# Altium PCB PCB1.PcbDoc
Units mil, origin at the board's own origin, x right, y up, seen from the top; angles counter-clockwise.
Board outline 3080.9 x 2293.49 mil, 2 copper layers (Top Layer, Bottom Layer); 59 components, 87 nets, 266 pads, 62 vias.
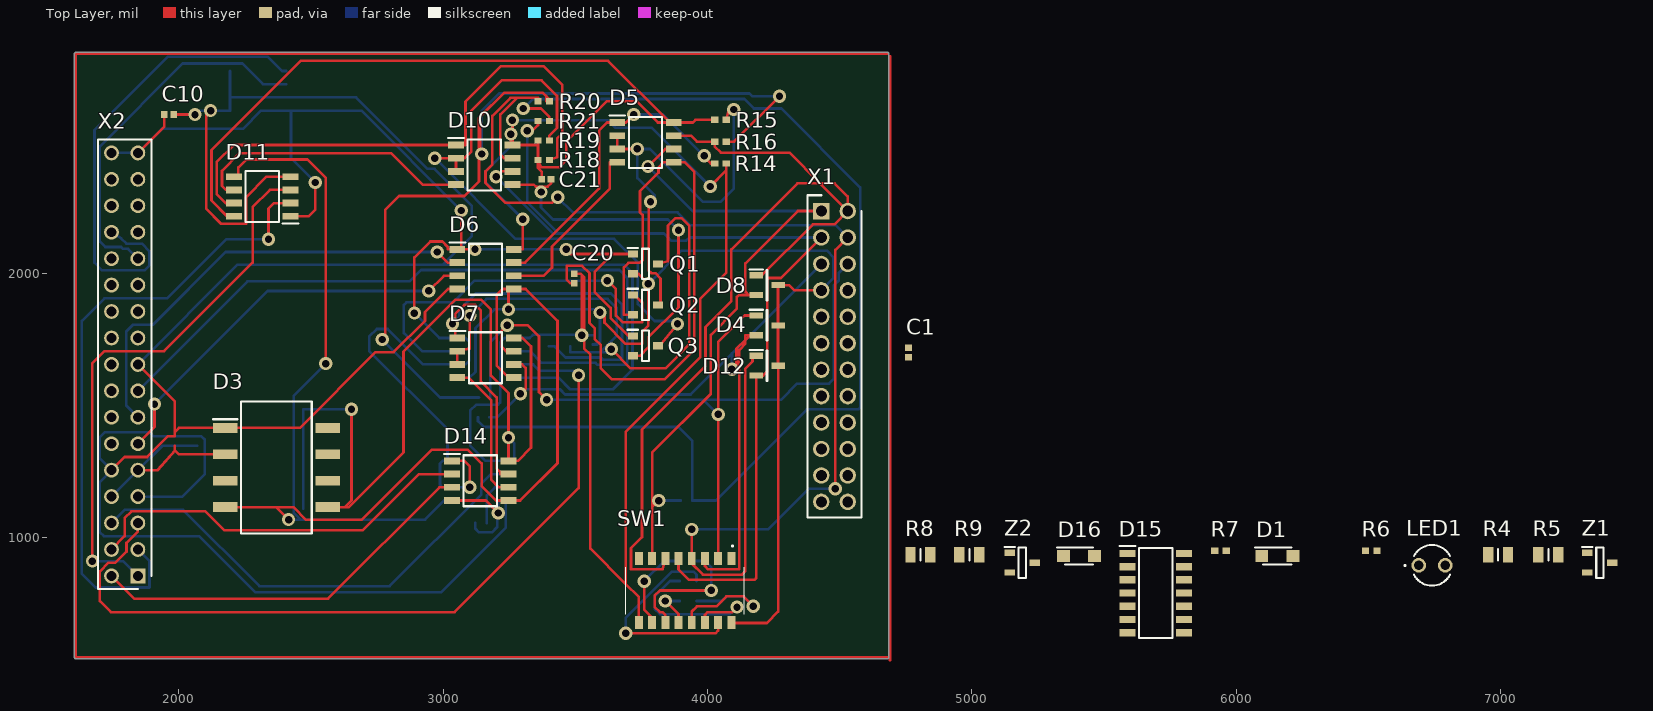
[diagram p0: Top Layer view]
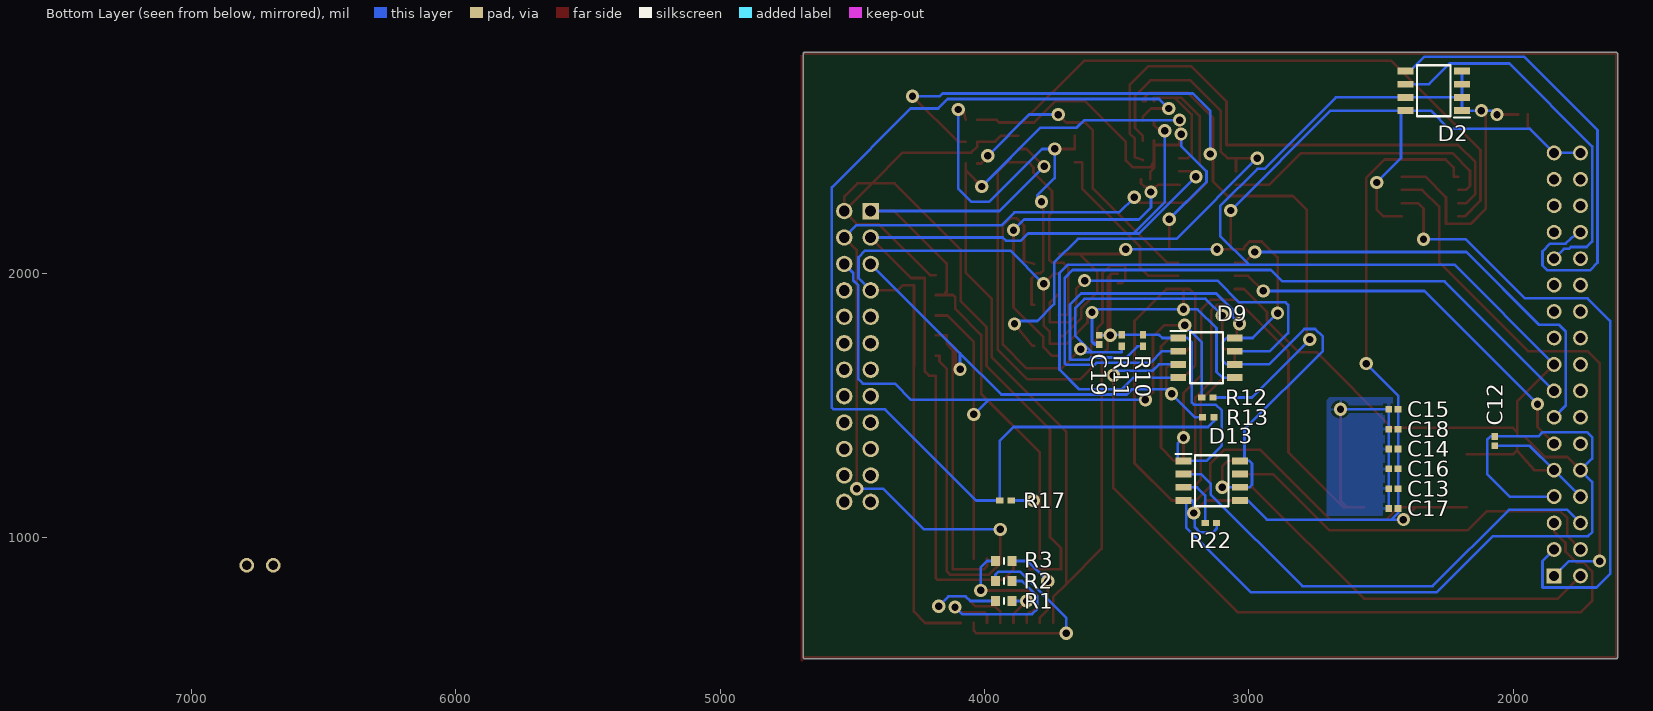
[diagram p1: Bottom Layer view, seen from below]

## Layer stack, top to bottom
Top Solder: solder mask 0.4, Solder Resist, Dk 3.5
Top Layer: signal copper 1.4
Dielectric 1: dielectric 12.6, FR-4, Dk 4.8
Bottom Layer: signal copper 1.4
Bottom Solder: solder mask 0.4, Solder Resist, Dk 3.5

## Board outline
1604.99,546.54 1604.98,2830 cw(c1610,2830) 1610,2835.01 4680.87,2835.01 cw(c4680.87,2830) 4685.88,2830 cw(c4680.87,2830) 4685.01,2827.18 4685.02,546.54 cw(c4680,546.54) 4680,541.52 1610,541.52 cw(c1610,546.54)

## Design rules (kind name [scope] priority, off if disabled: settings)
Clearance [All] p1: gap=10 ignorepadtopadclearanceinfootprint=FALSE except(0: Arc-Hole Track-Hole SMDPad-Hole THPad-Hole Via-Hole Fill-Hole Poly-Hole Region-Hole Text-Hole)
PolygonConnect [All] p1: connectstyle=Relief reliefconductorwidth=10 reliefentries=4 polygonreliefangle="90 Angle" airgapwidth=10
RoomDefinition Sheet1 [InComponentClass('Sheet1')] p1: confinementstyle=ConfineIn formatcopy=TRUE lockcomponents=FALSE outline 4730,600 7460,600 7460,1085 4730,1085
RoomDefinition Sheet2 [InComponentClass('Sheet2')] p2: confinementstyle=ConfineIn formatcopy=TRUE lockcomponents=FALSE outline 1620,541.54 4690,541.54 4690,2825 1620,2825
RoutingVias [All] p1: holewidth=28 width=50 viastyle="Through Hole" minholewidth=28 minwidth=50 maxholewidth=28 maxwidth=50
SolderMaskExpansion [All] p1: expansion=4
Width [All] p1: maxlimit=10 minlimit=10 preferedwidth=10
30 further rules are at their usual default settings.

## Classes and differential pairs
component class Sheet1: D1 D15 D16 LED1 R4 R5 R6 R7 R8 R9 Z1 Z2
component class Sheet2: C10 C12 C13 C14 C15 C16 C17 C18 C19 C20 C21 D2 D3 D4 D5 D6 D7 D8 D9 D10 D11 D12 D13 D14 Q1 Q2 Q3 R1 R2 R3 R10 R11 R12 R13 R14 R15 R16 R17 R18 R19 R20 R21 R22 SW1 X1 X2

## Components (designator, comment, footprint, x,y, rotation, side; value= is the part's Value field where it differs from the comment)
C1 "04023C104JAT2A" CAPC1005X56N 4760,1700 r90 top
C10 "04024D106MAT2A" CAPC1005X56N 1962.72,2600 r180 top
C12 "04024D106MAT2A" CAPC1005X56N 2070,1365 r270 bottom
C13 "04023C104JAT2A" CAPC1005X56N 2452.72,1185.04 r0 bottom
C14 "04023C104JAT2A" CAPC1005X56N 2452.72,1334.96 r0 bottom
C15 "04023C104JAT2A" CAPC1005X56N 2452.72,1484.96 r0 bottom
C16 "04023C104JAT2A" CAPC1005X56N 2452.72,1260 r0 bottom
C17 "04024D106MAT2A" CAPC1005X56N 2452.72,1109.96 r0 bottom
C18 "04024D106MAT2A" CAPC1005X56N 2452.72,1410 r0 bottom
C19 "04023C104JAT2A" CAPC1005X56N 3565,1747.72 r90 bottom
C20 "04023C104JAT2A" CAPC1005X56N 3495,1980 r90 top
C21 "04023C104JAT2A" CAPC1005X56N 3390,2355 r180 top
D1 "SMF18AT1G" SODFL3616X98N 6155,930 r0 top
D2 "M24C16-WMN6TP" SOIC127P600X175-8N 2300,2690 r0 bottom
D3 "AM1L-0505S-NZ" SOP254P1120X650-8N 2368.9,1265 r0 top
D4 "SM712.TCT" SOT95P237X112-3N 4225,1802.5 r0 top
D5 "ADM483EARZ" SOIC127P600X175-8N 3765,2495 r0 top
D6 "ADUM1201ARZ-RL7" SOIC127P600X175-8N 3160,2015 r0 top
D7 "ADM483EARZ" SOIC127P600X175-8N 3160,1680 r0 top
D8 "SM712.TCT" SOT95P237X112-3N 4225,1955 r0 top
D9 "ADUM1200ARZ-RL7" SOIC127P600X175-8N 3160,1680 r180 bottom
D10 "ADM483EARZ" SOIC127P600X175-8N 3155,2410 r0 top
D11 "ADUM1201ARZ-RL7" SOIC127P600X175-8N 2315,2290 r180 top
D12 "SM712.TCT" SOT95P237X112-3N 4225,1650 r0 top
D13 "ADUM1200ARZ-RL7" SOIC127P600X175-8N 3140,1215 r180 bottom
D14 "ADUM1201ARZ-RL7" SOIC127P600X175-8N 3140,1215 r0 top
D15 "74HCT14D,652" SOIC127P600X175-14N 5695,790 r0 top
D16 "SMF18AT1G" SODFL3616X98N 5405,930 r0 top
LED1 "151034GS03000" 151034GS03000 6740,895 r0 top
Q1 "2N7002" SOT95P240X120-3N 3765,2035 r0 top
Q2 "2N7002" SOT95P240X120-3N 3765,1880 r0 top
Q3 "2N7002" SOT95P240X120-3N 3765,1725 r0 top
R1 "BLM18AG121SN1D" BEADC1608X95N 3926.5,760 r180 bottom
R2 "BLM18AG121SN1D" BEADC1608X95N 3926.5,835.72 r180 bottom
R3 "BLM18AG121SN1D" BEADC1608X95N 3926.5,911.44 r180 bottom
R4 "CPF0805B330RE" RESC2012X65N 6990,935 r0 top
R5 "CPF0805B330RE" RESC2012X65N 7180,935 r0 top
R6 "CPF0402B300RE" RESC1005X35N 6510,950 r0 top
R7 "CPF0402B10K2E1" RESC1005X35N 5940,950 r0 top
R8 "CPF0805B330RE" RESC2012X65N 4805,935 r0 top
R9 "CPF0805B330RE" RESC2012X65N 4990,935 r0 top
R10 "CPF0402B14K7E1" RESC1005X35N 3400,1745 r90 bottom
R11 "CPF0402B14K7E1" RESC1005X35N 3480,1745 r90 bottom
R12 "CPF0402B475RE1" RESC1005X35N 3156.65,1530 r180 bottom
R13 "CPF0402B475RE1" RESC1005X35N 3153.35,1455 r0 bottom
R14 "CPF0402B14K7E1" RESC1005X35N 4048.35,2415 r0 top
R15 "CPF0402B14K7E1" RESC1005X35N 4048.35,2580 r180 top
R16 "CPF0402B475RE1" RESC1005X35N 4048.35,2497.5 r0 top
R17 "CPF0402B475RE1" RESC1005X35N 3920,1140 r180 bottom
R18 "CPF0402B14K7E1" RESC1005X35N 3380,2428.16 r180 top
R19 "CPF0402B14K7E1" RESC1005X35N 3380,2502.11 r180 top
R20 "CPF0402B475RE1" RESC1005X35N 3380,2650 r0 top
R21 "CPF0402B475RE1" RESC1005X35N 3380,2576.05 r180 top
R22 "CPF0402B14K7E1" RESC1005X35N 3143.35,1055 r0 bottom
SW1 "NHDS08T" NHDS08T 3915,798.94 r180 top
X1 "1-826656-2" HDRV24W85P254_2X12_3048X500X900P 4430,2235 r270 top
X2 "6-534206-7" SHDR34W76P254_2X17_4318X503X813P 1845,855 r90 top
Z1 "SZBZX84C10LT1G" SOT96P237X111-3N 7375,905 r0 top
Z2 "SZBZX84C10LT1G" SOT96P237X111-3N 5190,905 r0 top

## Footprints (in the part's own frame and the unit in brackets; to place one, negate y for a bottom-side part, rotate by r counter-clockwise, add the part's x,y. Pads: shape width x height; smd on the part's side, far side on the other; paste and mask are expansions set on the pad)
151034GS03000 [mm]
  round 1.41 hole 0.91: 1(-1.27,0) 2(1.27,0)
  silkscreen extent -2.63,-1.95 1.73,1.95
BEADC1608X95N [mm]
  rect 0.85x1 smd: 1(-0.8,0) 2(0.8,0)
  silkscreen extent 0,-0.3 0,0.3, body extent -0.8,-0.4 0.8,0.4, height 0.95
CAPC1005X56N [mm]
  rect 0.65x0.64 smd: 1(-0.45,0) 2(0.45,0)
  body extent -0.5,-0.25 0.5,0.25, height 0.56
HDRV24W85P254_2X12_3048X500X900P [mm]
  rect 1.575x1.575 hole 1.05: 1(0,0)
  round 1.575 hole 1.05: 2(0,2.54) 3(2.54,0) 4(2.54,2.54) 5(5.08,0) 6(5.08,2.54) 7(7.62,0) 8(7.62,2.54) 9(10.16,0) 10(10.16,2.54) 11(12.7,0) 12(12.7,2.54) 13(15.24,0) 14(15.24,2.54) 15(17.78,0) 16(17.78,2.54) 17(20.32,0) 18(20.32,2.54) 19(22.86,0) 20(22.86,2.54) 21(25.4,0) 22(25.4,2.54) 23(27.94,0) 24(27.94,2.54)
  silkscreen extent -1.52,-1.33 29.46,3.87, body extent -1.27,-1.23 29.21,3.77, height 9
NHDS08T [mm]
  rect 0.76x1.25 smd: 1(-4.445,-3.075) 2(-3.175,-3.075) 3(-1.905,-3.075) 4(-0.635,-3.075) 5(0.635,-3.075) 6(1.905,-3.075) 7(3.175,-3.075) 8(4.445,-3.075) 9(4.445,3.075) 10(3.175,3.075) 11(1.905,3.075) 12(0.635,3.075) 13(-0.635,3.075) 14(-1.905,3.075) 15(-3.175,3.075) 16(-4.445,3.075)
  silkscreen extent -5.69,-4.35 5.69,2.25
RESC1005X35N [mm]
  rect 0.7x0.6 smd: 1(-0.55,0) 2(0.55,0)
  body extent -0.5,-0.25 0.5,0.25, height 0.35
RESC2012X65N [mm]
  rect 1x1.45 smd: 1(-0.95,0) 2(0.95,0)
  silkscreen extent 0,-0.53 0,0.53, body extent -1,-0.63 1,0.63, height 0.65
SHDR34W76P254_2X17_4318X503X813P [mm]
  rect 1.425x1.425 hole 0.95: 1(0,0)
  round 1.425 hole 0.95: 2(0,2.54) 3(2.54,0) 4(2.54,2.54) 5(5.08,0) 6(5.08,2.54) 7(7.62,0) 8(7.62,2.54) 9(10.16,0) 10(10.16,2.54) 11(12.7,0) 12(12.7,2.54) 13(15.24,0) 14(15.24,2.54) 15(17.78,0) 16(17.78,2.54) 17(20.32,0) 18(20.32,2.54) 19(22.86,0) 20(22.86,2.54) 21(25.4,0) 22(25.4,2.54) 23(27.94,0) 24(27.94,2.54) 25(30.48,0) 26(30.48,2.54) 27(33.02,0) 28(33.02,2.54) 29(35.56,0) 30(35.56,2.54) 31(38.1,0) 32(38.1,2.54) 33(40.64,0) 34(40.64,2.54)
  silkscreen extent -1.27,-1.31 41.91,3.85
SODFL3616X98N [mm]
  rect 1.24x1.12 smd: 1(-1.5,0) 2(1.5,0)
  silkscreen extent -2.12,-0.82 1.35,0.82, body extent -1.8,-0.82 1.8,0.82, height 0.98
SOIC127P600X175-8N [mm]
  rect 1.525x0.65 smd: 1(-2.712,1.905) 2(-2.712,0.635) 3(-2.712,-0.635) 4(-2.712,-1.905) 5(2.712,-1.905) 6(2.712,-0.635) 7(2.712,0.635) 8(2.712,1.905)
  silkscreen extent -3.47,-2.45 1.6,2.58, body extent -3,-2.45 3,2.45, height 1.75
SOIC127P600X175-14N [mm]
  rect 1.55x0.7 smd: 1(-2.725,3.81) 2(-2.725,2.54) 3(-2.725,1.27) 4(-2.725,0) 5(-2.725,-1.27) 6(-2.725,-2.54) 7(-2.725,-3.81) 8(2.725,-3.81) 9(2.725,-2.54) 10(2.725,-1.27) 11(2.725,0) 12(2.725,1.27) 13(2.725,2.54) 14(2.725,3.81)
  silkscreen extent -3.5,-4.33 1.6,4.51, body extent -3,-4.33 3,4.33, height 1.75
SOP254P1120X650-8N [mm]
  rect 2.35x0.95 smd: 1(-4.925,3.81) 2(-4.925,1.27) 3(-4.925,-1.27) 4(-4.925,-3.81) 5(4.925,-3.81) 6(4.925,-1.27) 7(4.925,1.27) 8(4.925,3.81)
  silkscreen extent -6.1,-6.35 3.4,6.35, body extent -5.6,-6.35 5.6,6.35, height 6.5
SOT95P237X112-3N [mm]
  rect 1.3x0.6 smd: 1(-1.05,0.95) 2(-1.05,-0.95) 3(1.05,0)
  silkscreen extent -1.7,-1.46 0.05,1.5, body extent -1.18,-1.46 1.18,1.46, height 1.12
SOT95P240X120-3N [mm]
  rect 1x0.7 smd: 1(-1.2,0.95) 2(-1.2,-0.95) 3(1.2,0)
  silkscreen extent -1.7,-1.46 0.35,1.55, body extent -1.2,-1.46 1.2,1.46, height 1.2
SOT96P237X111-3N [mm]
  rect 1x0.6 smd: 1(-1.2,0.955) 2(-1.2,-0.955) 3(1.2,0)
  silkscreen extent -1.7,-1.46 0.35,1.51, body extent -1.18,-1.46 1.18,1.46, height 1.11

## Part data
C1 C13 C14 C15 C16 C19 C20 C21: "Capacitor", Manufacturer_Name=AVX, Mouser Part Number=581-04023C104JAT2A, RS Part Number=1356696, Datasheet Link=http://www.mouser.com/catalog/supplier/library/pdf/AVXSurfaceMountCeramic.pdf, Height=0.56mm, Manufacturer_Part_Number=04023C104JAT2A, Mouser Price/Stock=http://www.mouser.com/Search/ProductDetail.aspx?qs=ZBeOGGPQgEHeKFST9wrKRw%3d%3d, RS Price/Stock=https://uk.rs-online.com/web/p/products/1356696
C10 C12 C17 C18: "Capacitor", Manufacturer_Name=AVX, Mouser Part Number=581-04024D106MAT2A, Datasheet Link=http://www.mouser.com/catalog/supplier/library/pdf/AVXSurfaceMountCeramic.pdf, Height=0.56mm, Manufacturer_Part_Number=04024D106MAT2A, Mouser Price/Stock=https://www.mouser.com/Search/Refine.aspx?Keyword=581-04024D106MAT2A
D1 D16: "Diode", Manufacturer_Name="ON Semiconductor", Allied_Number=70600054, Allied Price/Stock=http://www.alliedelec.com/on-semiconductor-smf18at1g/70600054/, Datasheet Link=http://www.onsemi.com/pub/Collateral/SMF5.0AT1-D.PDF, Height=0.98mm, Manufacturer_Part_Number=SMF18AT1G
D2: "Integrated Circuit", Manufacturer_Name=STMicroelectronics, Mouser Part Number=511-M24C16-WMN6TP, RS Part Number=6862390, Allied_Number=70013715, Allied Price/Stock=http://www.alliedelec.com/stmicroelectronics-m24c16-wmn6tp/70013715/, Datasheet Link=http://www.st.com/st-web-ui/static/active/en/resource/technical/document/datasheet/DM00061111.pdf, Height=1.75mm, Manufacturer_Part_Number=M24C16-WMN6TP, Mouser Price/Stock=https://www.mouser.com/Search/Refine.aspx?Keyword=511-M24C16-WMN6TP, RS Price/Stock=https://uk.rs-online.com/web/p/products/6862390
D3: "Power Supply", Manufacturer_Name=aimtec, Datasheet Link=http://www.aimtec.com/site/Aimtec/files/Datasheet/HighResolution/AM1L-N-Z.pdf, Height=6.5mm, Manufacturer_Part_Number=AM1L-0505S-NZ
D4 D8 D12: "Diode", Manufacturer_Name=SEMTECH, Mouser Part Number=947-SM712.TCT, RS Part Number=6783470P, Datasheet Link=http://docs-emea.rs-online.com/webdocs/1385/0900766b81385d5f.pdf, Height=1.12mm, Manufacturer_Part_Number=SM712.TCT, Mouser Price/Stock=https://www.mouser.com/Search/Refine.aspx?Keyword=947-SM712.TCT, RS Price/Stock=http://uk.rs-online.com/web/p/products/6783470P
D5 D7 D10: "Integrated Circuit", Manufacturer_Name="Analog Devices", Mouser Part Number=584-ADM483EARZ, RS Part Number=2509605926, Manufacturer_Part_Number=ADM483EARZ, Mouser Price/Stock=https://www.mouser.com/Search/Refine.aspx?Keyword=584-ADM483EARZ, RS Price/Stock=http://uk.rs-online.com/web/p/products/2509605926
D6 D11 D14: "Integrated Circuit", Manufacturer_Name="Analog Devices", Mouser Part Number=584-ADUM1201ARZ-R7, RS Part Number=1832299, Datasheet Link=http://www.analog.com/media/en/technical-documentation/data-sheets/ADuM1200_1201.pdf, Height=1.75mm, Manufacturer_Part_Number=ADUM1201ARZ-RL7, Mouser Price/Stock=https://www.mouser.com/Search/Refine.aspx?Keyword=584-ADUM1201ARZ-R7, RS Price/Stock=http://uk.rs-online.com/web/p/products/1832299
D9 D13: "Integrated Circuit", Manufacturer_Name="Analog Devices", Mouser Part Number=584-ADUM1200ARZ-R7, RS Part Number=9140444, Datasheet Link=http://componentsearchengine.com/Datasheets/1/ADUM1200ARZ-RL7.pdf, Manufacturer_Part_Number=ADUM1200ARZ-RL7, Mouser Price/Stock=https://www.mouser.com/Search/Refine.aspx?Keyword=584-ADUM1200ARZ-R7, RS Price/Stock=http://uk.rs-online.com/web/p/products/9140444
D15: "Integrated Circuit", Manufacturer_Name=Nexperia, Mouser Part Number=771-HCT14D652, RS Part Number=1130641P, Datasheet Link=https://assets.nexperia.com/documents/data-sheet/74HC_HCT14.pdf, Height=1.75mm, Manufacturer_Part_Number=74HCT14D,652, Mouser Price/Stock=https://www.mouser.com/Search/Refine.aspx?Keyword=771-HCT14D652, RS Price/Stock=http://uk.rs-online.com/web/p/products/1130641P
LED1: "LED", Manufacturer_Name="Wurth Elektronik", RS Part Number=9010930, Datasheet Link=http://katalog.we-online.de/led/datasheet/151034GS03000.pdf, Manufacturer_Part_Number=151034GS03000, RS Price/Stock=https://uk.rs-online.com/web/p/products/9010930
Q1 Q2 Q3: "MOSFET (N-Channel)", Manufacturer_Name="Fairchild Semiconductor", Mouser Part Number=512-2N7002, Datasheet Link=http://www.onsemi.com/pub/Collateral/NDS7002A-D.PDF, Height=1.2mm, Manufacturer_Part_Number=2N7002, Mouser Price/Stock=https://www.mouser.com/Search/Refine.aspx?Keyword=512-2N7002
R1 R2 R3: "Ferrite Bead", Manufacturer_Name="Murata Electronics", Mouser Part Number=81-BLM11A121S, RS Part Number=6291628, Datasheet Link=http://www.murata.com/~/media/webrenewal/support/library/catalog/products/emc/emifil/c31e.ashx?la=en-gb, Height=0.95mm, Manufacturer_Part_Number=BLM18AG121SN1D, Mouser Price/Stock=https://www.mouser.com/Search/Refine.aspx?Keyword=81-BLM11A121S, RS Price/Stock=http://uk.rs-online.com/web/p/products/6291628
R4 R5 R8 R9: "Resistor", Manufacturer_Name="TE Connectivity", RS Part Number=6662471, Allied_Number=70286839, Allied Price/Stock=https://www.alliedelec.com/te-connectivity-cpf0805b330re/70286839/, Datasheet Link=http://docs-europe.electrocomponents.com/webdocs/13d1/0900766b813d116f.pdf, Height=0.65mm, Manufacturer_Part_Number=CPF0805B330RE, RS Price/Stock=https://uk.rs-online.com/web/p/products/6662471
R6: "Resistor", Manufacturer_Name="TE Connectivity", RS Part Number=6661327, Datasheet Link=http://www.farnell.com/datasheets/1786775.pdf, Height=0.35mm, Manufacturer_Part_Number=CPF0402B300RE, RS Price/Stock=https://uk.rs-online.com/web/p/products/6661327
R7: "Resistor", Manufacturer_Name="TE Connectivity", Mouser Part Number=279-CPF0402B10K2E1, RS Part Number=7015028, Allied_Number=70286155, Allied Price/Stock=https://www.alliedelec.com/te-connectivity-cpf0402b10k2e1/70286155/, Datasheet Link=http://www.farnell.com/datasheets/1786775.pdf, Height=0.35mm, Manufacturer_Part_Number=CPF0402B10K2E1, Mouser Price/Stock=https://www.mouser.com/Search/Refine.aspx?Keyword=279-CPF0402B10K2E1, RS Price/Stock=https://uk.rs-online.com/web/p/products/7015028
R10 R11 R14 R15 R18 R19 R22: "Resistor", Manufacturer_Name="TE Connectivity", Mouser Part Number=279-CPF0402B14K7E1, RS Part Number=7015122, Allied_Number=70286210, Allied Price/Stock=https://www.alliedelec.com/te-connectivity-cpf0402b14k7e1/70286210/, Datasheet Link=http://www.farnell.com/datasheets/1786775.pdf, Height=0.35mm, Manufacturer_Part_Number=CPF0402B14K7E1, Mouser Price/Stock=https://www.mouser.com/Search/Refine.aspx?Keyword=279-CPF0402B14K7E1, RS Price/Stock=https://uk.rs-online.com/web/p/products/7015122
R12 R13 R16 R17 R20 R21: "Resistor", Manufacturer_Name="TE Connectivity", RS Part Number=7014807, Allied_Number=70286471, Allied Price/Stock=https://www.alliedelec.com/te-connectivity-cpf0402b475re1/70286471/, Datasheet Link=http://www.farnell.com/datasheets/1786775.pdf, Height=0.35mm, Manufacturer_Part_Number=CPF0402B475RE1, RS Price/Stock=https://uk.rs-online.com/web/p/products/7014807
SW1: "Switch", Manufacturer_Name=Apem, Mouser Part Number=642-NHDS08T, Datasheet Link=https://componentsearchengine.com/Datasheets/1/NHDS08T.pdf, Height=1.45mm, Manufacturer_Part_Number=NHDS08T, Mouser Price/Stock=https://www.mouser.com/Search/Refine.aspx?Keyword=642-NHDS08T
X1: "Connector", Manufacturer_Name="TE Connectivity", Mouser Part Number=571-1-826656-2, RS Part Number=6689624P, Allied_Number=70299217, Allied Price/Stock=https://www.alliedelec.com/te-connectivity-1-826656-2/70299217/, Datasheet Link=http://www.te.com/usa-en/product-1-826656-2.html, Height=9mm, Manufacturer_Part_Number=1-826656-2, Mouser Price/Stock=https://www.mouser.com/Search/Refine.aspx?Keyword=571-1-826656-2, RS Price/Stock=http://uk.rs-online.com/web/p/products/6689624P
X2: "Connector", Manufacturer_Name="TE Connectivity", Mouser Part Number=571-6-534206-7, RS Part Number=7936824, Datasheet Link=https://benl.rs-online.com/web/p/products/7936824P, Height=8.13mm, Manufacturer_Part_Number=6-534206-7, Mouser Price/Stock=https://www.mouser.com/Search/Refine.aspx?Keyword=571-6-534206-7, RS Price/Stock=https://uk.rs-online.com/web/p/products/7936824
Z1 Z2: "Zener Diode", Manufacturer_Name="ON Semiconductor", Mouser Part Number=863-SZBZX84C10LT1G, RS Part Number=8052914, Allied_Number=70467681, Allied Price/Stock=http://www.alliedelec.com/on-semiconductor-szbzx84c10lt1g/70467681/, Datasheet Link=http://www.onsemi.com/pub/Collateral/BZX84C2V4LT1-D.PDF, Height=1.11mm, Manufacturer_Part_Number=SZBZX84C10LT1G, Mouser Price/Stock=https://www.mouser.com/Search/Refine.aspx?Keyword=863-SZBZX84C10LT1G, RS Price/Stock=http://uk.rs-online.com/web/p/products/8052914

## Via types
v1: diameter 50, hole 28, Top Layer to Bottom Layer, 62 vias

## Nets (pads, with @x,y where several pads share a name; then routed paths per layer and width w, separated by ;. In a path a pad name is that pad's centre, name@x,y a point inside that pad or via, vN(x,y) a via of type N, cw(c..) or ccw(c..) an arc to the next point about the centre after c; other vN are vias at no path point)
+3.3V: C10.2 D2.8 D6.1 D9.6 D9.8 D11.1 D13.6 D13.8 D14.1 D15.14 Q1.1 Q3.1 R6.2 X2.33 X2.34 | length 5661.6
  Top Layer w10: X2.33 1945,2555 C10.2 ; D11.1 2491,2215 2516,2240 v1(2516,2343) ; v1(2891,1849) 2891,2059.76 2951.24,2120 2997,2120 3017,2100 3017,2090 D6.1 D6.1@3068,2090 ; D14.1 3080,1290 3100,1270 v1(3100,1190) ; v1(3068,2237) D6.1@3068,2090 ; v1(3120,2090) D6.1@3068,2090 ; v1(3465,2090) 3482.6,2072.4 3640,2072.4 ; Q3.1 3701,1762.4 3633,1830.4 3633,1868.6 3573,1928.6 3573,2005.4 3640,2072.4 ; Q1.1 3640,2072.4
  Bottom Layer w10: X2.34 X2.33 1936,2546 2242,2546 2311,2615 D2.8 D2.8@2424,2615 ; v1(2516,2343) 2424,2435 D2.8@2424,2615 ; v1(2891,1849) 2985,1755 D9.8 3084,1755 3099,1740 3099,1670 3084,1655 D9.6 2924,1655 2790,1789 2749,1789 2720,1760 2720,1706 3016,1410 D13.8@3016,1290 ; D13.8 D13.8@3016,1290 ; v1(3068,2237) 2690,2615 D2.8@2424,2615 ; v1(3100,1190) D13.6 2998,1190 2988,1200 2988,1280 2998,1290 D13.8@3016,1290 ; v1(3120,2090) v1(3465,2090)
+5: C1.2 C12.2 D3.2 X2.8 X2.9 | length 792.4
  Top Layer w10: X2.9 1920,1255 1985,1330 ; 1985,1347.28 1985,1330 ; D3.2 2000,1315 1985,1330
  Bottom Layer w10: X2.8 X2.9 1937.28,1347.28 C12.2
+5V_ISO: C13.2 C14.2 C15.2 C16.2 C17.2 C18.2 C19.2 C20.2 C21.2 D3.5 D5.8 D6.8 D7.8 D9.1 D10.8 D11.8 D13.1 D14.8 R10.2 R11.2 R14.2 R15.2 R18.2 R19.2 SW1.9 | length 12869.5
  Top Layer w10: D11.8 2183,2215 2123.21,2274.79 2123.21,2465.21 2461,2803 3624,2803 D5.8@3857,2570 ; D3.5 2628,1115 ; v1(2653,1484.96) 2653,1140 2628,1115 ; D14.8 D14.8@3247,1290 ; v1(3256,2526) 3256,2485 D10.8 ; v1(3261.77,2579) D10.8 ; D7.8 3300,1755 3331.79,1723.21 3331.79,1339.79 3282,1290 D14.8@3247,1290 ; D6.8 3301,2090 v1(3301,2204) ; R19.2 3358.35,2485 ; C21.2 3372.28,2384 3358.35,2397.94 R18.2 ; C20.2 3520,1997.72 3524,1993.72 ; v1(3524,1765.43) 3524,1993.72 ; SW1.9 3740,775.05 3690.04,825.01 ; v1(4010,2328) 4070,2388 ; R15.2 3954,2580 3944,2570 D5.8 D5.8@3857,2570 ; R14.2 4070,2388 ; 2628,1115 2643,1115 2849.87,1321.87 2849.87,1703.87 3046,1900 3142,1900 3180,1862 3180,1613.24 3247,1546.24 v1(3247,1378) D14.8@3247,1290 ; D10.8 3358.35,2485 ; R18.2 3358.35,2485 ; R18.2 3370,2401 3440,2401 3465,2426 3465,2497 3619,2651 3731,2651 3812,2570 D5.8@3857,2570 ; 3524,1993.72 3533,1984.72 3533,1716 3556.51,1692.49 3556.51,958.54 3690.04,825.01 ; 3690.04,825.01 3690.04,1400.04 3972,1682 3972,1903 4070,2001 4070,2388
  Bottom Layer w10: C17.2 C13.2 C16.2 C14.2 C18.2 C15.2 v1(2653,1484.96) ; v1(3247,1378) 3269,1356 3269,1290 D13.1 3160,1290 3102,1348 3102,1480 3125,1503 3208,1503 3215.29,1510.29 3215.29,1738.29 3232,1755 D9.1 3327,1755 3338.65,1766.65 R10.2 R11.2 3521,1766.65 3522.22,1765.43 v1(3524,1765.43) C19.2 ; v1(3256,2526) 3256,2481.21 3160,2385.21 3160,2345 v1(3301,2204) ; v1(3261.77,2579) 3621.82,2579 3650.63,2550.19 3787.81,2550.19 v1(4010,2328)
GND: C1.1 C10.1 C12.1 D2.1 D2.2 D2.3 D2.4 D2.7 D3.1 D6.4 D9.4 D11.4 D13.4 D14.4 D15.7 R22.1 X2.7 X2.10 X2.17 | length 10976
  Top Layer w10: X2.10 1795,1305 1880,1305 1957.72,1382.72 1985,1382.72 1985,1400 ; X2.17 1985,1515 1985,1400 ; C10.1 v1(2061,2600) ; v1(2120,2615) 2103.21,2598.21 2103.21,2243.79 2160,2187 2254,2187 2254,2287 2332,2365 D11.4 ; D14.4 3161,1140 v1(3208,1093) ; D6.4 3018.66,1940 2931,1852.34 2931,1820 2812.51,1701.51 2744.51,1701.51 2458,1415 D3.1 2000,1415 1985,1400
  Bottom Layer w10: X2.7 2013,1155 2098,1240 2098,1370 2085.28,1382.72 C12.1 1904.28,1382.72 1888,1399 1720,1399 1701,1380 1701,1299 X2.10 1701,1211 1701,1020 1716,1005 2077,1005 2289,793 2992,793 3237,1038 D13.4@3237,1140 ; X2.17 2222,2032 3000,2032 ; v1(2061,2600) 2076,2615 v1(2120,2615) D2.1 D2.2 ; D2.4 D2.3 D2.2 ; R22.1 3121.69,1033.31 3135,1020 3185,1020 3204,1039 3204,1130 3214,1140 D13.4@3217,1140 ; v1(3208,1093) 3208,1131 D13.4@3217,1140 ; D13.4 D13.4@3237,1140 ; D9.4 3436,1605 3480,1561 3641.87,1561 3716,1635.13 3716,1999.87 3683.87,2032 3000,2032 ; D2.2 D2.7 2670,2665 2940,2395 2967,2395 3108,2254 3108,2140 3000,2032 ; D13.4@3217,1140 D13.4@3237,1140
GND_0: X1.8
GND_1: X1.23
GND_2: C13.1 C14.1 C15.1 C16.1 C17.1 C18.1 C19.1 D3.4 D4.3 D6.5 D7.5 D8.3 D9.5 D11.5 D12.3 D13.5 D14.5 Q1.2 SW1.16 X1.7 | length 9291.8
  Top Layer w10: D3.4 2368,1115 ; D11.5 2225,2365 2225,2400 2255,2430 2486,2430 2556,2360 v1(2556,1658) ; v1(2415,1068) 2368,1115 ; v1(3247,1863) D6.5@3247,1940 ; D7.5 3247.18,1605 3201.75,1650.42 3201.75,1917.75 3224,1940 D6.5@3247,1940 ; v1(3593,1851.6) 3610,1834.6 3610,1813 3690,1733 3753,1733 3753,1780 3776,1803 v1(3776,1960) 3738.4,1997.6 Q1.2 ; SW1.16 4090,677 4224,677 4267,720 4267,1650 D12.3 D4.3 D8.3 4308.76,1955 4328.76,1935 X1.7 ; 2368,1115 2433.73,1115 2481.73,1067 2691,1067 2956,1332 3093,1332 3145,1280 3145,1195 3200,1140 D14.5 3291,1140 3432.11,1281.11 3432.11,1819.89 3312,1940 D6.5 D6.5@3247,1940
  Bottom Layer w10: v1(2415,1068) 2460,1068 ; v1(2556,1658) 2435,1537 C15.1 C18.1 C14.1 C16.1 C13.1 C17.1 2435,1093 2460,1068 ; D13.5 3003,1140 2931,1068 2460,1068 ; D9.5 3100,1605 3122,1627 3122,1792 3193,1863 v1(3247,1863) 3593,1863 v1(3593,1851.6) 3593,1740 ; v1(3776,1960) 3901,2085 4451,2085 4476,2060 4476,1981 X1.7 ; 3593,1740 3583,1730 C19.1 3593,1740
NetC20_1: C20.1 D5.5 Q2.2 | length 2490.4
  Top Layer w10: C20.1 3480,1962.28 3467,1975.28 3467,2028 3525,2028 3553,2000 3553,1812 3573,1792 3573,1751.6 3596,1728.6 3596,1640 3637,1599 3838,1599 3950,1711 3950,2383 3913,2420 D5.5 3834,2420 3814,2400 3814,2380 3744,2310 3744,2230 3754,2220 3754,2050 3743,2039 3700,2039 3683,2022 3683,1842.6 Q2.2
NetC21_1: C21.1 D10.5 Q3.2 | length 1374
  Top Layer w10: D10.5 3342,2335 3350,2327 ; v1(3370,2307) 3350,2327 ; C21.1 3407.72,2340 3394.72,2327 3350,2327 ; Q3.2 3744.6,1687.6 3777,1720 3777,1758 3890,1871 v1(3890,2163)
  Bottom Layer w10: v1(3370,2307) 3370,2249 3416,2203 3850,2203 v1(3890,2163)
NetD1_1: D1.1 R5.2 Z1.1
NetD1_2: D1.2 D16.2
NetD2_5: D2.5 X2.28 | length 1816
  Bottom Layer w10: X2.28 1781.95,2132 1802,2111.95 1860,2111.95 1889,2082.95 1889,2030 1870,2011 1710,2011 1681,2040 1681,2541 1959,2819 2336,2819 2390,2765 D2.5
NetD2_6: D2.6 X2.25 | length 1398.7
  Bottom Layer w10: X2.25 1808.05,2091.95 1789,2091.95 1781.95,2099 1722,2099 1701,2120 1701,2480 2014,2793 2240,2793 2318,2715 D2.6
NetD4_1: D4.1 D7.7 R12.1 SW1.2 X1.6 | length 3490.4
  Top Layer w10: D7.7 3236.75,1705 3221.75,1720 3221.75,1782.75 v1(3242,1803) 3320,1803 3362,1761 3362,1550 v1(3391,1521) ; SW1.2 v1(4040,1466) 4040,1739.9 4140,1839.9 D4.1
  Bottom Layer w10: R12.1 3178.31,1739.31 v1(3242,1803) ; v1(3391,1521) 3985,1521 ; v1(4040,1466) 3985,1521 ; X1.6 4496,2001 4496,1972 4477,1953 4477,1599 4460,1582 4339,1582 4278,1521 3985,1521
NetD4_2: D4.2 D7.6 R13.2 SW1.3 X1.5 | length 2982.8
  Top Layer w10: D7.6 3298,1655 3311.79,1641.21 3311.79,1563.79 v1(3291.79,1543.79) ; SW1.3 3990,892 4002,880 4119.96,880 4119.96,1710.33 4143,1733.37 4143,1748 ; v1(4092,1637) 4109.24,1654.24 4109.24,1714.24 4143,1748 ; D4.2 D4.2@4160.1,1765.1 ; 4143,1748 4143,1765.1 D4.2@4160.1,1765.1 ; 4143,1748 D4.2@4160.1,1765.1
  Bottom Layer w10: R13.2 3203,1455 v1(3291.79,1543.79) 3309,1561 3441,1561 3461,1541 3936,1541 4092,1697 ; v1(4092,1637) 4092,1697 ; X1.5 4092,1697
NetD5_1: D5.1 D6.7 R14.1 | length 1199.7
  Top Layer w10: D6.7 3310,2040 3590,2320 3590,2540 3620,2570 D5.1 3691,2570 v1(3721,2600) ; v1(3987,2444) 3987,2440 4012,2415 R14.1
  Bottom Layer w10: v1(3721,2600) 3831,2600 v1(3987,2444)
NetD5_2: D5.2 D5.3 Q2.3 R15.1 | length 1617.2
  Top Layer w10: D5.2 D5.3 v1(3734,2470) ; v1(3784,2270) 3777,2263 3777,2010 3787,2000 3802,2000 3822,1980 3822,1880 Q2.3 ; R15.1 4080,2619 v1(4099,2619)
  Bottom Layer w10: v1(3784,2270) 3800.64,2286.64 3800.64,2293.36 3734,2360 v1(3734,2470) 3782.34,2470 3982.34,2270 4049,2270 4099,2320 v1(4099,2619)
NetD5_4: D5.4 D6.6 | length 675
  Top Layer w10: D6.6 3380,1990 3411.15,2021.15 3411.15,2101.15 3630,2320 3630,2420 D5.4
NetD5_6: D5.6 D8.2 R17.2 SW1.7 X1.1 | length 2662.1
  Top Layer w10: v1(3774,2404) 3840,2470 D5.6 ; SW1.7 3790,1115 ; v1(3815,1140) 3790,1115 ; D8.2 4155.4,1917.6 ; X1.1 4341,2235 4143,2037 4143,1930 4155.4,1917.6 ; 3790,1115 3790,1322 4012,1544 4012,1767 4110,1865 4110,1909 4118.6,1917.6 4155.4,1917.6
  Bottom Layer w10: v1(3774,2404) 3943,2235 X1.1 ; v1(3815,1140) R17.2
NetD5_7: D5.7 D8.1 R16.1 SW1.6 X1.2 | length 3380.4
  Top Layer w10: SW1.6 3830,880.39 3710.04,880.39 3710.04,959.61 3752,1001.57 3752,1409 3992,1649 3992,1796 4090,1894 4090,2090 4340,2340 4425,2340 ; D5.7 3937,2520 3959.5,2497.5 R16.1 4026.69,2480 4050.69,2456 4309,2456 4425,2340 ; D8.1 4205.75,1992.4 4398.34,2185 4480,2185 X1.2 ; 4425,2340 X1.2 ; 4425,2340 4480,2340 4530,2290 X1.2
NetD6_2: D6.2 X2.13 | length 1736.3
  Top Layer w10: v1(2977,2080) 3017,2040 D6.2
  Bottom Layer w10: X2.13 1801,1499 1801,1780 1826,1805 1902,1805 2177,2080 v1(2977,2080)
NetD6_3: D6.3 X2.11 | length 1522.2
  Top Layer w10: X2.11 1908,1418 v1(1908,1505) ; v1(2945.1,1932.9) 3002.2,1990 D6.3
  Bottom Layer w10: v1(1908,1505) 2335.9,1932.9 v1(2945.1,1932.9)
NetD7_1: D7.1 D14.7 R10.1 | length 2138.5
  Top Layer w10: v1(3035,1808.55) v1@3045,1798.55 ; D7.1 3045,1755 v1@3045,1798.55 ; D14.7 3215,1240 3215,1248.75 3201.75,1262 3201.75,1529.81 3142,1589.56 3142,1858 3120,1880 3080,1880 3045,1845 v1@3045,1798.55
  Bottom Layer w10: v1(3035,1808.55) 3060,1833.55 3060,1860 3123,1923 3634,1923 3676,1881 3676,1674.08 3674.92,1673 3604,1673 3596,1681 3463,1681 3420.65,1723.35 R10.1
NetD7_2: D7.2 D7.3 Q1.3 R11.1 | length 2284.5
  Top Layer w10: D7.3 D7.2 3100,1715 v1(3100,1840) ; v1(3636,1713) 3709,1640 3840,1640 3930,1730 3930,2180 3902,2208 3878,2208 3850,2180 3850,2045 Q1.3
  Bottom Layer w10: v1(3100,1840) 3163,1903 3621.6,1903 3656,1868.6 3656,1763 3594,1701 ; R11.1 3480,1701 3594,1701 ; v1(3636,1713) 3624,1701 3594,1701
NetD7_4: D7.4 D14.6 | length 541.2
  Top Layer w10: D7.4 3095,1605 3181.75,1518.25 3181.75,1218.25 3210,1190 D14.6
NetD9_2: D9.2 X2.15 | length 2829.2
  Bottom Layer w10: X2.15 2259,1969 2873,1969 2916,2012 3666.39,2012 3696,1982.39 3696,1659 3690,1653 3584,1653 3576,1661 3372,1661 3328,1705 D9.2
NetD9_3: D9.3 X2.5 | length 3081.7
  Top Layer w10: X2.5 1845,1023.05 1801.95,980 1801.95,946.95 1760,905 1734.11,905 1701,871.89 1701,760 1743,718 3043,718 3512,1187 v1(3512,1614)
  Bottom Layer w10: D9.3 3340,1655 3364,1631 3495,1631 v1(3512,1614)
NetD9_7: D9.7 Q2.1 | length 1522.1
  Top Layer w10: v1(3621,1972) 3653,1940 3653,1840 3679.18,1813.82 3752.44,1813.82 3752.44,1888.96 3724,1917.4 Q2.1
  Bottom Layer w10: D9.7 2920,1705 2851,1774 2851,1880 2861,1890 3037,1890 3119,1972 v1(3621,1972)
NetD10_1: D10.1 D11.7 R18.1 | length 2096
  Top Layer w10: D11.7 2177,2265 2143.21,2298.79 2143.21,2420.21 2208,2485 D10.1 3084,2485 3084,2649.08 3217.92,2783 3380.05,2783 3450.43,2712.61 3450.43,2529.24 3431,2509.81 3431,2439.16 R18.1
NetD10_2: D10.2 D10.3 Q3.3 R19.1 | length 2312.6
  Top Layer w10: v1(2968,2435) D10.2 ; D10.3 D10.2 ; R19.1 3401.65,2520.46 3430.43,2549.24 3430.43,2670.57 3371.47,2729.53 3220.96,2729.53 3106,2614.57 3106,2460 3081,2435 D10.2 ; Q3.3 3818,1725 v1(3886,1808.31)
  Bottom Layer w10: v1(2968,2435) 3273,2130 3646,2130 3736,2040 3736,1883 3800,1819 3875.31,1819 v1(3886,1808.31)
NetD10_4: D10.4 D11.6 | length 1070.4
  Top Layer w10: D11.6 2178.21,2315 2163.21,2330 2163.21,2387.21 2230,2454 2803,2454 2922,2335 D10.4
NetD10_6: D10.6 D12.2 R21.2 SW1.5 X1.3 | length 3697.5
  Top Layer w10: v1(3200,2365) 3220,2385 D10.6 ; v1(3318,2539) 3337.35,2539 3358.35,2560 R21.2 ; SW1.5 3890,880 3930,840 4176.89,840 4184,847.11 D12.2@4184,1612.6 ; D12.2 D12.2@4184,1612.6 ; X1.3 4276.81,1981.81 4225,1981.81 4225,1627.6 4210,1612.6 D12.2@4184,1612.6
  Bottom Layer w10: v1(3200,2365) 3415,2150 3436,2150 ; v1(3318,2539) 3318,2268 3436,2150 ; X1.3 3931,2135 3919,2123 3862,2123 3835,2150 3436,2150
NetD10_7: D10.7 D12.1 R20.1 SW1.4 X1.4 | length 5012.1
  Top Layer w10: D10.7 3230,2435 3216,2449 3216,2600 3279,2663 ; R20.1 3358.35,2663 3279,2663 ; v1(3433,2287) 3413,2267 3234,2267 3160,2341 3160,2385.21 3186,2411.21 3186,2595 3254,2663 3279,2663 ; v1(3940,1031) SW1.4 3940,902 3982,860 4130,860 4143,873 4143,1639 4170,1666 4170,1687.4 D12.1 ; v1(4483,1185) 4483,2088 X1.4
  Bottom Layer w10: v1(3433,2287) 3490,2230 3885.99,2230 3933.99,2182 4483,2182 X1.4 ; v1(3940,1031) 4229,1031 4383,1185 v1(4483,1185)
NetD11_2: D11.2 X2.3 | length 2437.8
  Top Layer w10: v1(2339,2128) 2339,2244 2360,2265 D11.2
  Bottom Layer w10: X2.3 1889,911 1889,811 1685,811 1633,863 1633,1820 1718,1905 1956,1905 2179,2128 v1(2339,2128)
NetD11_3: D11.3 X2.1 | length 2087.2
  Top Layer w10: v1(1673,911) 1673,1660 1718,1705 1944,1705 2279,2040 2279,2249.86 2344.14,2315 D11.3
  Bottom Layer w10: v1(1673,911) 1789,911 X2.1
NetD13_2: D13.2 X2.6 | length 1841.8
  Bottom Layer w10: X2.6 1795,1105 2016,1105 2305,816 2797,816 3143.92,1162.92 3143.92,1203.92 3180,1240 D13.2
NetD13_3: D13.3 R22.2 | length 199.2
  Bottom Layer w10: R22.2 3165,1160 3195,1190 D13.3
NetD14_2: D14.2 X2.4 | length 1505.5
  Top Layer w10: X2.4 1795,1005 1795,1074 1820,1099 2100,1099 2171,1028 2696,1028 2908,1240 D14.2
NetD14_3: D14.3 X2.2 | length 1498.2
  Top Layer w10: X2.2 1831,769 2564,769 2985,1190 D14.3
NetD16_1: D16.1 R9.2 Z2.1
NetLED1_2: LED1.2 R6.1
NetR1_1: R1.1 SW1.13 | length 552.2
  Top Layer w10: SW1.13 3940,720 3960,740 4033.19,740 4070.67,777.48 4135.52,777.48 v1(4173,740)
  Bottom Layer w10: R1.1 4053.19,760 4070.67,777.48 4135.52,777.48 v1(4173,740)
NetR1_2: R1.2 SW1.12 | length 157.8
  Top Layer w10: v1(3840,760) 3890,710 SW1.12
  Bottom Layer w10: v1(3840,760) R1.2
NetR2_1: R2.1 SW1.15 | length 811.3
  Top Layer w10: v1(3690,638) 4030,638 4040,648 SW1.15
  Bottom Layer w10: v1(3690,638) 3690,696 3865,871 3946.99,871 3957.99,860 R2.1
NetR2_2: R2.2 SW1.14 | length 660.3
  Top Layer w10: SW1.14 3990,708 4000,718 4092,718 v1(4111,737)
  Bottom Layer w10: R2.2 3858,835.72 3800,777.72 3800,730 3820,710 4084,710 v1(4111,737)
NetR3_1: R3.1 SW1.11 | length 499.4
  Top Layer w10: SW1.11 3840,708 3830,718 3820,718 3800,738 3800,780 3820,800 v1(4013.44,800)
  Bottom Layer w10: R3.1 3990,911.44 4013.44,888 v1(4013.44,800)
NetR3_2: R3.2 SW1.10 | length 336.2
  Top Layer w10: v1(3760,835) 3760,727 3790,697 SW1.10
  Bottom Layer w10: v1(3760,835) 3836.44,911.44 R3.2
NetR4_1: R4.1
NetR4_2: R4.2 R5.1
NetR7_1: R7.1 Z2.3
NetR7_2: R7.2 Z1.3
NetR8_1: R8.1 X1.10
NetR8_2: R8.2 R9.1
NetSW1_1: SW1.1
NetSW1_8: SW1.8
NetX1_11: X1.11
NetX1_12: X1.12
NetX1_13: X1.13
NetX1_14: X1.14
NetX1_15: X1.15
NetX1_16: X1.16
NetX1_17: X1.17
NetX1_18: X1.18
NetX1_19: X1.19
NetX1_20: X1.20
NetX1_21: X1.21
NetX1_22: X1.22
NetX2_12: X2.12
NetX2_14: X2.14
NetX2_16: X2.16
NetX2_18: X2.18
NetX2_19: X2.19
NetX2_20: X2.20
NetX2_21: X2.21
NetX2_22: X2.22
NetX2_23: X2.23
NetX2_24: X2.24
NetX2_26: X2.26
NetX2_27: X2.27
NetX2_29: X2.29
NetX2_30: X2.30
NetX2_31: X2.31
NetX2_32: X2.32
VCC_24: X1.9
VCC_24_1: X1.24
VCC_R_A: R12.2 R16.2 R20.2 | length 3704.5
  Top Layer w10: v1(2769,1749) 2781,1761 2781,2240 2833,2292 3080,2292 3135,2347 3135,2587 3140,2592 ; v1(3146,2451) 3140,2457 3140,2592 ; R16.2 4100.5,2497.5 v1(4272,2669) ; 3140,2592 3231,2683 3376,2683 ; 3376,2683 3376.36,2683 3401.65,2657.7 R20.2 3389,2650 3389,2670 3376,2683
  Bottom Layer w10: v1(2769,1749) 2988,1530 R12.2 ; v1(3146,2451) 3146,2615 3210.81,2679.81 4158.64,2679.81 4169.45,2669 v1(4272,2669)
VCC_R_B: R13.1 R17.1 R21.1 | length 4250.3
  Top Layer w10: v1(3303,2623) 3370,2623 3401.65,2591.35 R21.1
  Bottom Layer w10: R13.1 3131.69,1440 3153.69,1418 3890,1418 3941.65,1366.35 R17.1 4031,1140 4376,1485 4570,1485 4577,1492 4577,2325 4279,2623 4175,2623 4139,2659 3339,2659 v1(3303,2623)
pads on no net: D3.3 D3.6 D3.7 D3.8 D13.7 D15.1 D15.2 D15.3 D15.4 D15.5 D15.6 D15.8 D15.9 D15.10 D15.11 D15.12 D15.13 LED1.1 Z1.2 Z2.2
copper on no net: | length 12992.1
  Top Layer w10: 4382,2830 4382.87,2830 ; 4680,546.54 1610,546.54 ; 4680.87,2830 1610,2830 ; 4690,536.54 4690,2820 ; 1610,546.54 1610,2830 ; 1610,546.54 1610,2830

## Polygon pours and split planes (outlines as drawn)
+5V_ISO on Bottom Layer "+5V_ISO_L02_P000" (solid, pour order 0): 2455,1530 2695,1530 2705,1520 2705,1085 2690,1070 2460,1070 2455,1075